# Altium PCB Master - OLD.PcbDoc (part 2 of 3)
Units mm, origin at the board's own origin, x right, y up, seen from the top; angles counter-clockwise.
Board outline 154.8 x 60 mm, 4 copper layers (Top Layer, GND-Layer, PWR-Layer, Bottom Layer), stack 1.57 mm thick; 131 components, 96 nets, 448 pads, 522 vias.
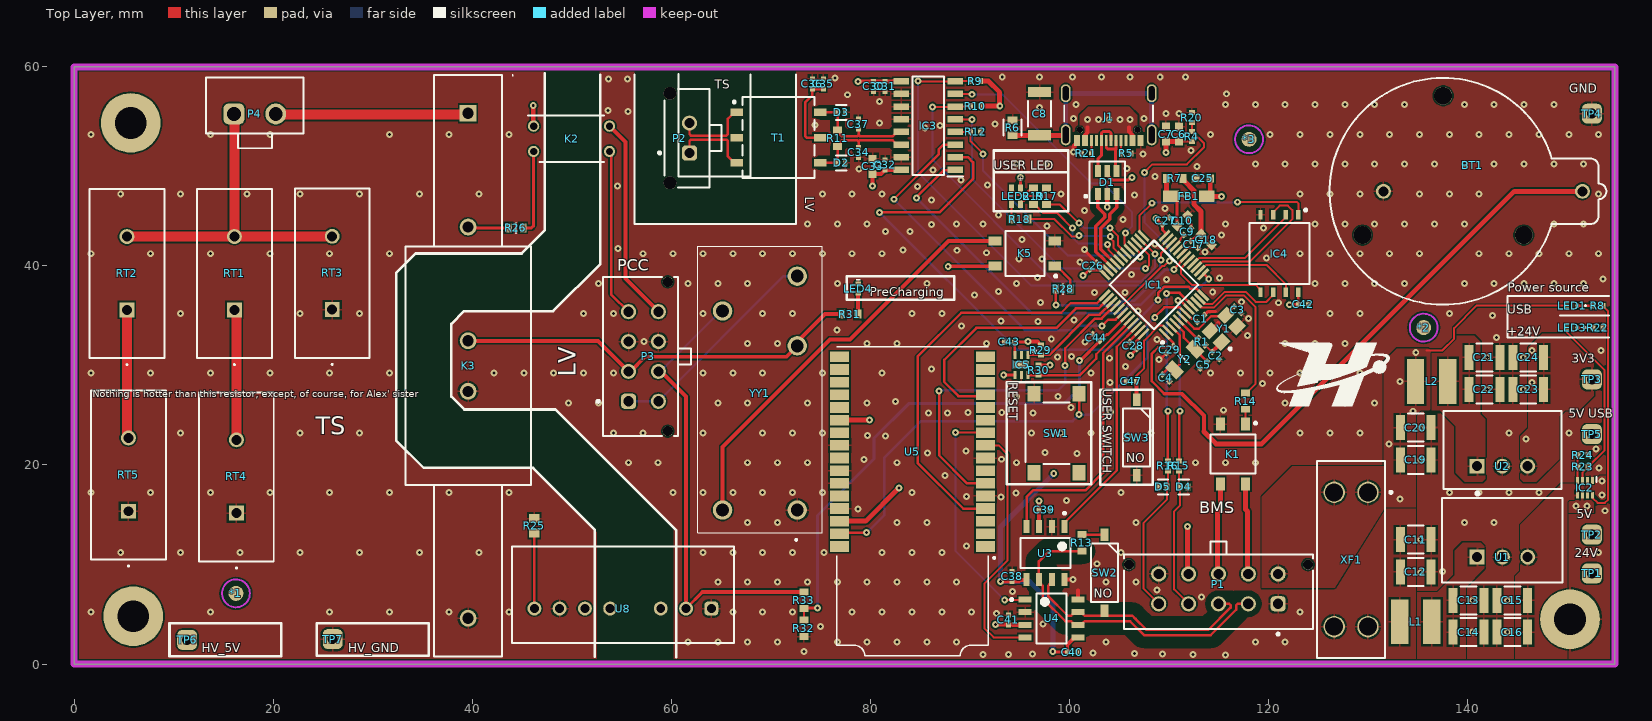
[diagram p0: Top Layer view]

## Part data (continued)
T1: library part CMP-16309-000039-1, "XFMR CMC MODULE AECQ BATT MNGT", Inductance Primary=150uH, Isolation Voltage=4300VDC, Manufacturer=Pulse, Package=0, Temperature="-40°C to +125°C", Temperature Range High=+125°C, Temperature Range Low=-40°C, Automotive=Yes, Automotive Grade="Grade 1", Category=Trans, ClassName=TPL_Trans, ComponentLink2Description=Datasheet, ComponentLink2URL=https://productfinder.pulseeng.com/product/HM2103NL, Device Class L1="Passive Components", Device Class L2=Transformers, Device Class L3=unset, Digikey Description="XFMR CMC MODULE AECQ BATT MNGT", Height=5.72mm, Insertion Loss=0.25dB, Lead Free=Yes, Manufacturer Part Number=HM2103NL, Obsolete Part=false, Octopart=https://octopart.com/hm2103nl-pulse-87646222, Return Loss=20dB, RoHS=TRUE, Standoff Height=0.13mm, Turns Ratio=1:1
TP1 TP2 TP3 TP4 TP5 TP6 TP7: library part CMP-00030-00001-6, Design Item ID=GTT_ProbeerPunt, Source=GTT_MainComponentLibrary.SchLib
U1: library part CMP-014-0003-2, "MagI3C-FDSM Fixed Step Down Regulator Module, SIP-3, 8-36Vin, 5Vout, 1Aout", Input Voltage=8-42V, Manufacturer Part Number=173010542, Operating Temperature="-40 to +85degC", Output Current=1A, Output Voltage=5V, ComponentLink1Description=Manufacturer, ComponentLink1URL=http://www.we-online.de, ComponentLink2Description=Datasheet, ComponentLink2URL=https://www.we-online.com/catalog/datasheet/173010542.pdf, Design Item ID=173010535, Height=10.5mm, Length=11.6mm, Mounting Technology=THT, Packaging=Tube, Published Date="March 2020", Publisher="Wurth Elektronik", Size=SIP-3, Source=MagI3C-FDSM.SchLib, Width=8.5mm
U2: library part CMP-014-0006-2, "MagI3C-FDSM Fixed Step Down Regulator Module, SIP-3, 4.75-36Vin, 3.3Vout, 0.5Aout", Input Voltage=4.75-36V, Operating Temperature="-40 to +85degC", Output Current=0.5A, Output Voltage=3.3V, ComponentLink1Description=Manufacturer, ComponentLink1URL=http://www.we-online.de, ComponentLink2Description=Datasheet, ComponentLink2URL=https://www.we-online.com/catalog/datasheet/173950336.pdf, Design Item ID=173950336, Height=10.16mm, Length=11.6mm, Manufacturer Part Number=173950336, Mounting Technology=THT, Packaging=Tube, Published Date="March 2020", Publisher="Wurth Elektronik", Size=SIP-3, Source=MagI3C-FDSM.SchLib, Width=7.55mm
U3 U4: library part CMP-10098-000014-1, "IC TRANSCEIVER HALF 1/1 8HVSON", Manufacturer="NXP Semiconductors", Max Junction Temp=+150°C, Max Supply Voltage=5.25V, Min Supply Voltage=4.75V, Nominal Supply Current=5-45mA, Package=SOT96-1, Temperature="-40°C to +150°C", Temperature Range Low=-40°C, Automotive=Yes, Automotive Grade="Grade 0", Category=IC, ClassName=CAN_Trans, ComponentLink2Description=Datasheet, ComponentLink2URL=https://www.nxp.com/docs/en/data-sheet/TJA1044.pdf, Device Class L1="Integrated Circuits (ICs)", Device Class L2="Interface ICs", Device Class L3=unset, Digikey Description="IC TRANSCEIVER HALF 1/1 8HVSON", Footprint Url=https://www.nxp.com/docs/en/package-information/SOT96-1.pdf, Height=1.75mm, Interface=CAN, Lead Free=Yes, Manufacturer Part Number=TJA1044GT/3Z, Mouser Description="High-Speed CAN Transceiver with Standby Mode 3 to 5V 8-Pin SOIC", Octopart=https://octopart.com/tja1044gt%2F3z-nxp+semiconductors-82944780, RoHS=TRUE, Standoff Height=0.1mm, Temperature Range High=+150°C
U5: library part CMP-00030-00002-9, Case/Package=None, Availability=Unavailable, Component Type=Standard, Design Item ID=STLINK-V3MODS, MP=STLINK-V3MODS, Pins=32, Price=None, Source=STLINK-V3MODS.SchLib
U8: library part CMP-002-000000-1, "WPME-VISM Variable Isolated Module, THT, SIP-8, 8-42Vin, 3.3-6Vout", Case/Size Code=SIP-8, Input Voltage Max=42V, Input Voltage Min=8V, Isolation Voltage=2000V, Manufacturer="Wurth Elektronik", Operating Temperature Max=85°C, Operating Temperature Min=-40°C, Output Voltage Max=6V, Output Voltage Min=3.3V, Category="Isolated Converter", ClassName=HV, Component Type=Standard, ComponentLink1Description="Website Link", ComponentLink1URL=https://www.we-online.com/redexpert/article/17791063215?ad, ComponentLink2Description="Datasheet Link", ComponentLink2URL=https://www.we-online.com/redexpert/spec/17791063215?ad, Design Item ID=17791063215, Height=11.1mm, Length=21.8mm, Manufacturer Part Number=17791063215, Match Code=WPME-VISM, Mount="Through Hole", Packaging=Tube, Pin Count=6, Source=WPME-VISM.SchLib, Width=9.2mm
XF1: library part CMP-2000-05461-1, "FUSE HOLDER, PCB MOUNT, 500VAC, 20A, ROHS", Current Rating=30A, Manufacturer=Keystone-Electronics, Voltage=500V, Category=CircuitProtection, Contact Finish=TinNickel, Contact Material=Brass, Datasheet URL=http://datasheet.octopart.com/3557-2-Keystone-datasheet-15715937.pdf, Datasheet Version=Apr-13, Family=Fuseholders, For Use With/Related Products=ATC,ATO257,MINI897, Fuse Size="0.43\"Lx0.15\"Wx0.64\"H(10.92mmx3.81mmx16.25mm)", Fuse Type=Blade, Fuseholder Type=Block, Manufacturer URL=http://www.keyelco.com/, Mounting Type=PCB, Number of Circuits=1, Orientation=Vertical, Series=-, Termination Style=PCPin
Y1: library part CMP-2000-07332-2, "X1E0000210193 TSX-3225 16MHZ 16PF", Case/Package=SMD/SMT, ESR (Equivalent Series Resistance)=60R, Frequency=16MHz, Frequency Stability=18ppm, Frequency Tolerance=10ppm, Load Capacitance=16pF, Max Operating Temperature=85°C, Min Operating Temperature=-40°C, Package Quantity=250, Drive Level=200uW, Height=0.024inch, Lead Free="Lead Free", Length=0.126inch, Mount="Surface Mount", Packaging="Tape and Reel", RoHS Compliant=Yes, Series=TSX-3225, Termination=SMD/SMT, Tolerance=10ppm, Weight=0.000564oz, Width=0.098inch
Y2: "Crystal or Oscillator", Manufacturer_Name=ECS, Datasheet Link=http://www.ecsxtal.com/store/pdf/ECX_34S.pdf, Height=1mm, Manufacturer_Part_Number=ECS-.327-6-34S-TR
YY1: "Relay or Contactor", Manufacturer_Name="Omron Electronics", Mouser Part Number=653-G2RL-14-DC5, Arrow Part Number=G2RL-14-DC5, Arrow Price/Stock=https://www.arrow.com/en/products/g2rl14dc5/omron?region=nac, Datasheet Link=https://www.mouser.com/datasheet/2/307/en-g2rl-472571.pdf, Height=15.7mm, Manufacturer_Part_Number=G2RL-14-DC5, Mouser Price/Stock=https://www.mouser.co.uk/ProductDetail/Omron-Electronics/G2RL-14-DC5?qs=HDDQUw%2F3PhqmQhZT1d%252BPSg%3D%3D

## Free pads (board coordinates)
  round 6 hole 3.2: 5(5.675,54.375) 5(5.925,4.8) 5(150.3,4.5)

## Via types
v1: diameter 0.7, hole 0.3, Top Layer to Bottom Layer, 522 vias

## Nets (pads, with @x,y where several pads share a name; then routed paths per layer and width w, separated by ;. In a path a pad name is that pad's centre, name@x,y a point inside that pad or via, vN(x,y) a via of type N, cw(c..) or ccw(c..) an arc to the next point about the centre after c; other vN are vias at no path point)
+5V_HV: K2.1 TP6.1 U8.6 | length 2.1
  Top Layer w0.45: v1(46.125,56.1) 46.145,56.08 46.145,54.065 K2.1@46.165,54.045
AIR_LOW: P3.1 P3.5 YY1.3 | length 22.2
  Bottom Layer w0.254: P3.1@55.7,26.4 P3.5@58.7,26.4 71.275,38.975 YY1.3@72.65,38.975
AUX_IO0: IC1.8 R15.1 | length 17.8
  Top Layer w0.25: v1(110.9,36.55) 110.986,36.464 111.197,36.464 IC1.8@112.027,35.634 ; R15.1@111.05,20.4 111.05,25.35 v1(111.1,25.4)
  Bottom Layer w0.25: v1(110.9,36.55) 110.9,36.428 111.1,36.228 v1(111.1,25.4)
AUX_IO0_OUT: D4.2 P1.4 R15.2 | length 14.2
  Top Layer w0.2: D4.2@111.011,17.8 R15.2@111.011,19.4 ; D4.2@111.1,17.8 111.1,15.925 110.525,15.35 110.525,7.5 P1.4@111.975,6.05
AUX_IO1: IC1.9 R16.1 | length 20.1
  Top Layer w0.25: v1(109.775,37.225) 109.85,37.3 111.068,37.3 IC1.9@112.381,35.987 ; R16.1@109.9,20.4 v1(109.9,25.4)
  Bottom Layer w0.25: v1(109.775,37.225) 109.775,25.647 109.9,25.522 v1(109.9,25.4)
AUX_IO1_OUT: D5.2 P1.5 R16.2 | length 14.8
  Top Layer w0.2: P1.5@108.975,6.05 107.45,7.575 107.45,14.175 109.8,16.525 D5.2@109.8,17.8 ; D5.2@109.9,18 R16.2@109.9,19.4
CAN_BRIDGE_RX: U4.4 U5.9 | length 25.5
  Top Layer w0.2: U5.9@91.55,21.97 92.88,21.97 93.8,21.05 93.8,10.425 91.45,8.075 91.45,3.6 92.38,2.67 U4.4@95.55,2.67
CAN_BRIDGE_TX: U4.1 U5.10 | length 23.4
  Top Layer w0.2: v1(88.575,23.25) 90.834,23.25 U5.10@90.945,23.361 ; v1(93.5,6.425) 95.495,6.425 U4.1@95.55,6.48
  Bottom Layer w0.2: v1(88.575,23.25) 88.575,11.35 v1(93.5,6.425)
CAN_HI: P1.3 SW2.2 U3.7 U4.7 | length 24.4
  Top Layer w0.248: U3.7@98.21,8.525 98.21,8.175 98.034,7.999 97.994,7.999 97.849,7.854 97.849,6.828 99.828,4.849 100.179,4.849 100.324,4.994 100.324,5.034 100.5,5.21 U4.7@100.85,5.21 101.2,5.21 101.376,5.034 101.376,4.994 101.521,4.849 106.326,4.849 106.647,4.528 107.727,3.448 113.974,3.448 116.201,5.675 116.201,5.905 116.056,6.05 P1.3@114.975,6.05
CAN_LO: P1.2 R13.1 U3.6 U4.6 | length 32.7
  Top Layer w0.248: R13.1@101.25,11.348 97.973,11.348 96.94,10.315 96.94,8.175 97.116,7.999 97.156,7.999 97.301,7.854 97.301,6.601 99.601,4.301 100.179,4.301 100.324,4.156 100.324,4.116 100.5,3.94 U4.6@100.85,3.94 101.2,3.94 101.376,4.116 101.376,4.156 101.521,4.301 106.099,4.301 107.5,2.9 114.201,2.9 116.749,5.448 116.749,5.905 116.894,6.05 P1.2@117.975,6.05
CAN_RX: IC1.45 U3.4 | length 27.9
  Top Layer w0.2: 103.375,31.207 IC1.45@106.387,34.219
  Top Layer w0.25: U3.4@95.69,13.8 95.69,16.79 96.345,17.445 101.595,17.445 103.375,19.225 103.375,31.207
CAN_STM_TX: IC1.46 U3.1 | length 23.1
  Top Layer w0.2: 104.75,31.875 IC1.46@106.741,33.866
  Top Layer w0.25: U3.1@99.48,13.825 99.48,14.175 104.775,19.47 104.775,25.66 104.75,25.685 104.75,31.875
FLASH_CS: IC1.25 IC4.1 | length 19.9
  Top Layer w0.2: IC1.25@107.448,43.041 107.032,43.457 107.032,45.032 v1(108.3,46.3) ; v1(116.9,46.4) 122.892,46.4 123.009,46.283 IC4.1@123.009,45.144
  Bottom Layer w0.2: v1(108.3,46.3) 108.35,46.35 116.85,46.35 v1(116.9,46.4)